# EAGLE board rectificador (EAGLE 9.6.2)
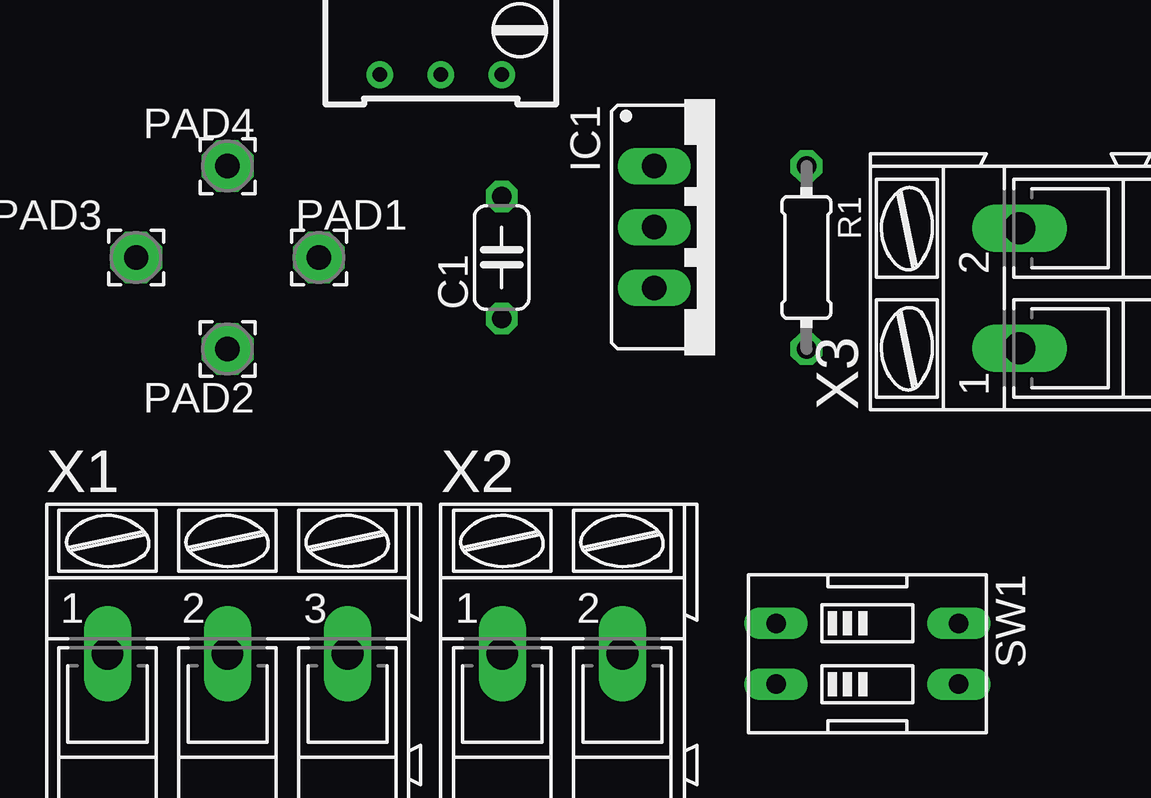
[diagram p0: board, top side]
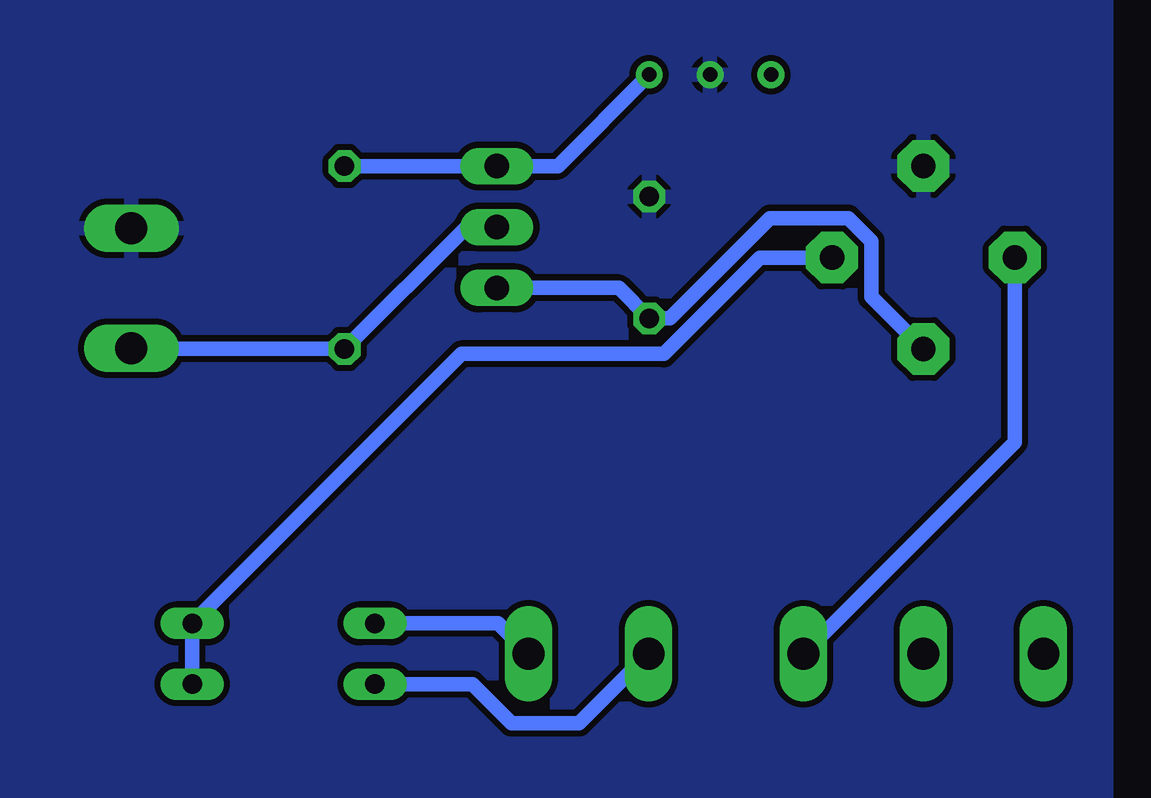
[diagram p1: board, bottom side, seen from below]

No outline drawn. Coordinates in mm, seen from the top.
Copper layers (1*16): Top 0.035mm / dielectric 1.5mm / Bottom 0.035mm
Design rules "default *": minimum track width 24mil, minimum drill 0.35mm, track to track 10mil, track to pad 10mil, pad to pad 10mil, via to via 10mil, smd to smd 10mil, copper to edge 40mil, drill to drill 6mil, minimum pad ring 10mil, minimum via ring 8mil, stop-mask expansion 4mil, vias tented up to drill 0mil, thermal gap 10mil

## Footprints (pad centres in the part's own frame; a part is rotated, then mirrored left to right if it is on the bottom)
C050-024X044 = drill 0.813 octagon: 1 -2.54,0; 2 2.54,0
317TS = drill 1.016 long: 1 -2.54,-2.54; 2 0,-2.54; 3 2.54,-2.54
2,15/1,0 = drill 1.016 pad 2.159 octagon: 1 0,0
0204/7 = drill 0.813 octagon: 1 -3.81,0; 2 3.81,0
RTRIM64W = drill 0.61: 1 1.27,-2.54; 2 1.27,0; 3 1.27,2.54
EDG-02 = drill 0.813 long: 1 -1.27,-3.81; 2 1.27,-3.81; 3 1.27,3.81; 4 -1.27,3.81
AK300/3 = drill 1.321 long: 1 -5.004,0; 2 0,0; 3 5.004,0
AK300/2 = drill 1.321 long: 1 -2.515,0; 2 2.489,0

## Placement (x,y rotation side)
C1  [C050-024X044]  19.05,24.13 90 top
IC1  [317TS]  27.94,25.4 270 top
PAD1  WIREPAD2,15/1,0  [2,15/1,0]  11.43,24.13 180 top
PAD2  WIREPAD2,15/1,0  [2,15/1,0]  7.62,20.32 180 top
PAD3  WIREPAD2,15/1,0  [2,15/1,0]  3.81,24.13 180 top
PAD4  WIREPAD2,15/1,0  [2,15/1,0]  7.62,27.94 180 top
R1  [0204/7]  31.75,24.13 270 top
R2  [RTRIM64W]  16.51,33.02 270 top
SW1  [EDG-02]  34.29,7.62 270 top
X1  [AK300/3]  7.62,7.62 0 top
X2  [AK300/2]  21.59,7.62 0 top
X3  [AK300/2]  40.64,22.86 90 top

## Library data of the parts
C1 = rcl; SPICEPREFIX: C
IC1 = v-reg
PAD1-PAD4 = wirepad
R1 = rcl; SPICEPREFIX: R
R2 = rcl; SPICEMODEL: X; SPICEPREFIXL: POT
SW1 = special
X1-X3 = con-ptr500; OC_FARNELL: unknown; OC_NEWARK: unknown

## Nets
0: PAD3.1 X1.3
6: SW1.2 X2.1
9: SW1.1 X2.2
-6: X1.2
-9: X1.1
GND: C1.2 PAD4.1 R2.2 X3.2
N$1: IC1.1 R1.1 R2.3
OUT: IC1.2 R1.2 X3.1
VCC: C1.1 IC1.3 PAD2.1
VSIN: PAD1.1 SW1.3 SW1.4

## Tracks (layer width: path | path; a pad name or v marks a point on that pad's centre or on a via)
0
  Bottom 0.61: X1.3 3.81,16.43 PAD3.1
6
  Bottom 0.61: SW1.2 26.42,6.35 24.8,4.72 21.97,4.72 X2.1
9
  Bottom 0.61: X2.2 25.35,8.89 SW1.1
GND
  pour Bottom: 0,0 0,35.56 48.26,35.56 48.26,0
N$1
  Bottom 0.61: R1.1 IC1.1 22.86,27.94 R2.3
OUT
  Bottom 0.61: IC1.2 26.67,25.4 R1.2 40.62,20.32 X3.1
VCC
  Bottom 0.61: IC1.3 20.32,22.86 C1.1 18.19,21.59 14.01,25.77 10.75,25.77 9.79,24.81 9.79,22.49 PAD2.1
VSIN
  Bottom 0.61: SW1.3 SW1.4 26.87,20.12 18.44,20.12 14.43,24.13 PAD1.1